# Altium PCB KC_BaseBoard4CompareTest.PcbDoc
Units mil, origin at the board's own origin, x right, y up, seen from the top; angles counter-clockwise.
Board outline 6745 x 7610 mil, 2 copper layers (Top Layer, Bottom Layer); 104 components, 67 nets, 264 pads, 2 vias.
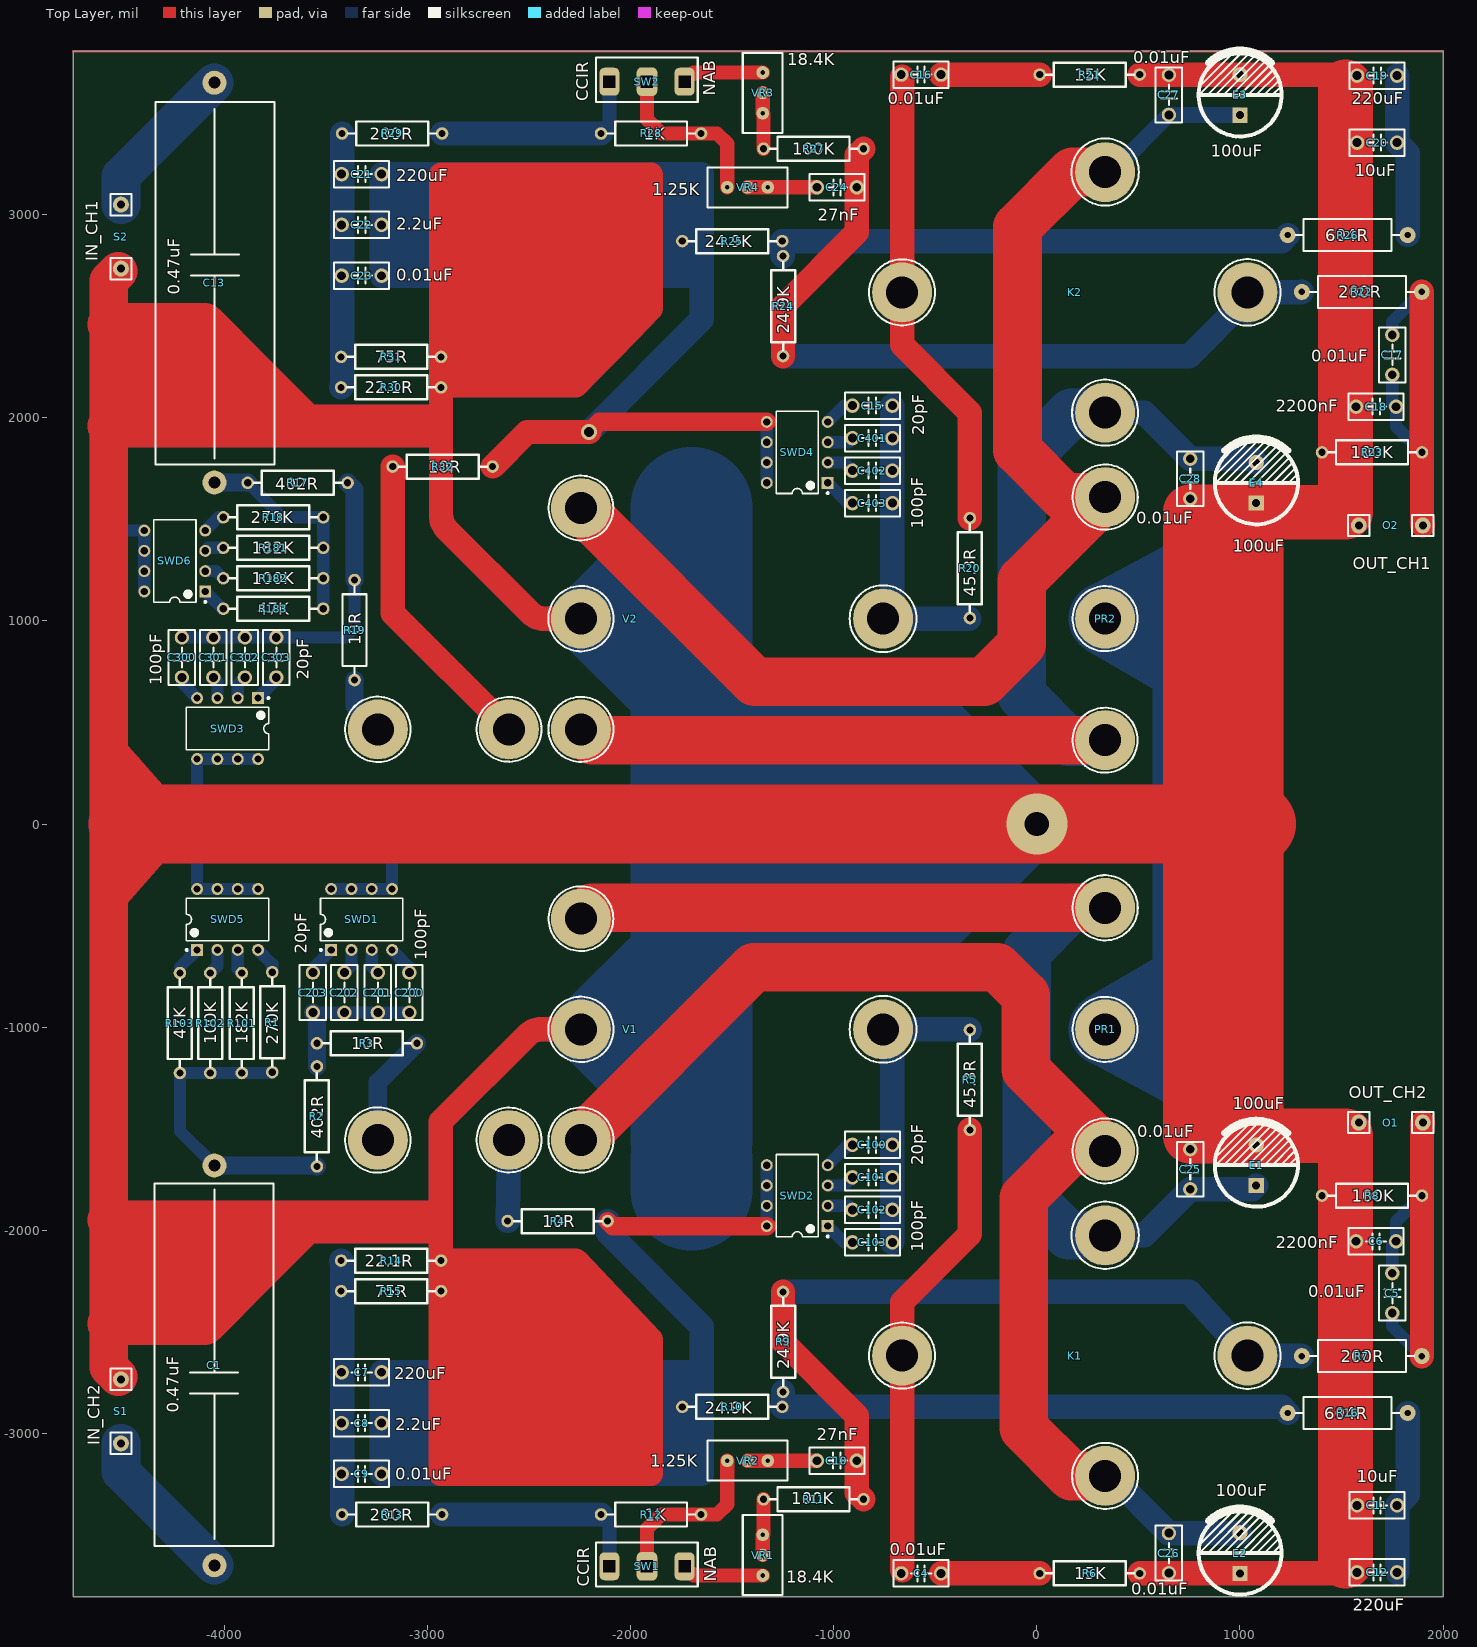
[diagram p0: Top Layer view]
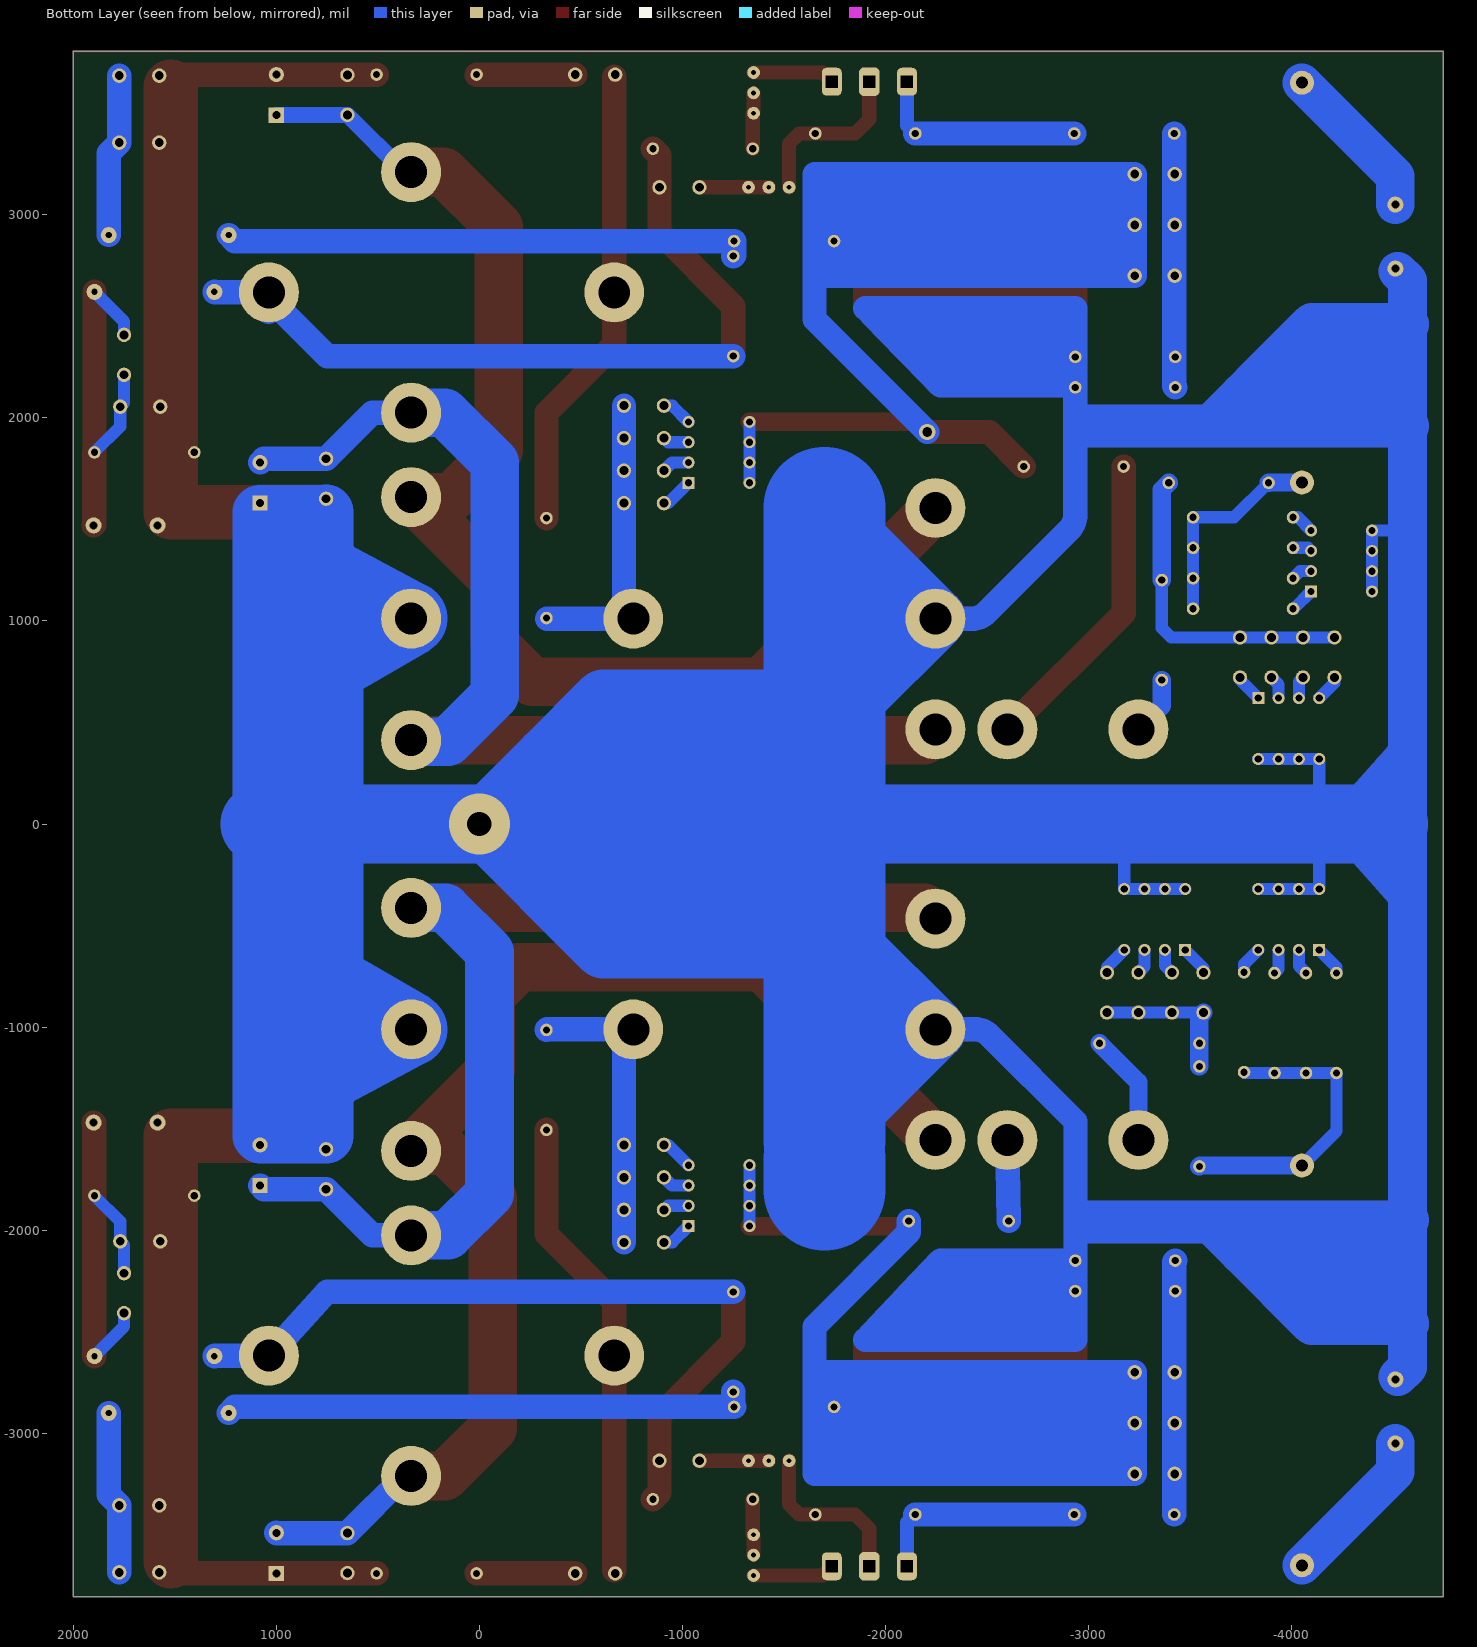
[diagram p1: Bottom Layer view, seen from below]

## Layer stack, top to bottom
Top Solder: solder mask 0.4, Solder Resist, Dk 3.5
Top Layer: signal copper 1.4
Dielectric 1: dielectric 12.6, FR-4, Dk 4.8
Bottom Layer: signal copper 1.4
Bottom Solder: solder mask 0.4, Solder Resist, Dk 3.5

## Board outline
-4745,-3805 2000,-3805 2000,3805 -4745,3805

## Design rules (kind name [scope] priority, off if disabled: settings)
Clearance [All] p1: gap=10 ignorepadtopadclearanceinfootprint=FALSE except(0: Arc-Hole Track-Hole SMDPad-Hole THPad-Hole Via-Hole Fill-Hole Poly-Hole Region-Hole Text-Hole)
PolygonConnect [All] p1: connectstyle=Relief reliefconductorwidth=10 reliefentries=4 polygonreliefangle="90 Angle" airgapwidth=10
RoutingVias [All] p1: holewidth=28 width=50 viastyle="Through Hole" minholewidth=28 minwidth=50 maxholewidth=28 maxwidth=50
SolderMaskExpansion [All] p1: expansion=4
Width [All] p1: maxlimit=1200 minlimit=10 preferedwidth=60
30 further rules are at their usual default settings.

## Components (designator, comment, footprint, x,y, rotation, side; value= is the part's Value field where it differs from the comment)
C1 "0.47uF" "CBB 50*30*30" -4050,-3650 r90 top
C4 "0.01uF" "CBB 6.3*6.3*5" -570,-3690 r0 top
C5 "0.01uF" "CBB 6.3*6.3*5" 1750,-2310 r90 top
C6 "2200nF" "CBB 6.3*6.3*5" 1670,-2055 r0 top
C7 "220uF" "CBB 6.3*6.3*5" -3325,-2700 r0 top
C8 "2.2uF" "CBB 6.3*6.3*5" -3325,-2950 r0 top
C9 "0.01uF" "CBB 6.3*6.3*5" -3325,-3200 r0 top
C10 "27nF" "CBB 6.3*6.3*5" -985,-3135 r0 top
C11 "10uF" "CBB 6.3*6.3*5" 1675,-3355 r0 top
C12 "220uF" "CBB 6.3*6.3*5" 1675,-3685 r0 top
C13 "0.47uF" "CBB 50*30*30" -4050,3650 r270 top
C15 "100pF" "CBB 6.3*6.3*5" -810,2060 r0 top
C16 "0.01uF" "CBB 6.3*6.3*5" -570,3690 r0 top
C17 "0.01uF" "CBB 6.3*6.3*5" 1750,2310 r90 top
C18 "2200nF" "CBB 6.3*6.3*5" 1670,2055 r180 top
C19 "220uF" "CBB 6.3*6.3*5" 1675,3685 r180 top
C20 "10uF" "CBB 6.3*6.3*5" 1675,3355 r180 top
C21 "220uF" "CBB 6.3*6.3*5" -3325,3200 r180 top
C22 "2.2uF" "CBB 6.3*6.3*5" -3325,2950 r180 top
C23 "0.01uF" "CBB 6.3*6.3*5" -3325,2700 r180 top
C24 "27nF" "CBB 6.3*6.3*5" -985,3135 r180 top
C25 "0.01uF" "CBB 6.3*6.3*5" 755,-1700 r90 top
C26 "0.01uF" "CBB 6.3*6.3*5" 650,-3590 r270 top
C27 "0.01uF" "CBB 6.3*6.3*5" 650,3590 r90 top
C28 "0.01uF" "CBB 6.3*6.3*5" 755,1700 r270 top
C100 "100pF" "CBB 6.3*6.3*5" -810,-1580 r0 top
C101 "100pF" "CBB 6.3*6.3*5" -810,-1740 r0 top
C102 "100pF" "CBB 6.3*6.3*5" -810,-1900 r0 top
C103 "20pF" "CBB 6.3*6.3*5" -810,-2060 r0 top
C200 "100pF" "CBB 6.3*6.3*5" -3090,-830 r270 top
C201 "100pF" "CBB 6.3*6.3*5" -3245,-830 r270 top
C202 "100pF" "CBB 6.3*6.3*5" -3410,-830 r270 top
C203 "20pF" "CBB 6.3*6.3*5" -3565,-830 r270 top
C300 "100pF" "CBB 6.3*6.3*5" -4210,820 r90 top
C301 "100pF" "CBB 6.3*6.3*5" -4055,820 r90 top
C302 "100pF" "CBB 6.3*6.3*5" -3900,820 r90 top
C303 "20pF" "CBB 6.3*6.3*5" -3745,820 r90 top
C401 "100pF" "CBB 6.3*6.3*5" -810,1900 r0 top
C402 "100pF" "CBB 6.3*6.3*5" -810,1740 r0 top
C403 "20pF" "CBB 6.3*6.3*5" -810,1580 r0 top
E1 "100uF" "CAP 5.0*10*20" 1080,-1680 r90 top
E2 "100uF" "CAP 5.0*10*20" 1000,-3590 r90 top
E3 "100uF" "CAP 5.0*10*20" 1000,3590 r90 top
E4 "100uF" "CAP 5.0*10*20" 1080,1680 r90 top
K1 "KCBuff" KCBuff_M4 -663.9,-2617.7 r0 top
K2 "KCBuff" KCBuff_M4 -663.9,2617.7 r0 top
O1 "OUT_CH2" SIGNAL_TERMINAL 1900,-1470 r180 top
O2 "OUT_CH1" SIGNAL_TERMINAL 1900,1470 r180 top
PR1 "MainBoardPowerRegulator4CompareTest" KC_MBPowerReg4Compare 336,-1011 r0 top
PR2 "MainBoardPowerRegulator4CompareTest" KC_MBPowerReg4Compare 336,1011 r0 top
R1 "270K" "RS 1/2W" -3765,-976.06 r270 top
R2 "402R" "RS 1/2W" -3545,-1440 r90 top
R3 "10R" "RS 1/2W" -3298.94,-1080 r180 top
R4 "10R" "RS 1/2W" -2360,-1955 r180 top
R5 "45.3R" "RS 1/2W" -330,-1260 r90 top
R6 "15K" "RS 1/2W" 260,-3690 r180 top
R7 "200R" "RS 1W" 1600,-2620 r0 top
R8 "100K" "RS 1/2W" 1650,-1830 r0 top
R9 "24.9K" "RS 1/2W" -1250,-2550 r270 top
R10 "24.9K" "RS 1/2W" -1500,-2870 r180 top
R11 "100K" "RS 1/2W" -1100,-3325 r180 top
R12 "1K" "RS 1/2W" -1900,-3400 r0 top
R13 "200R" "RS 1/2W" -3175,-3400 r180 top
R14 "22.1R" "RS 1/2W" -3180,-2150 r180 top
R15 "75R" "RS 1/2W" -3180,-2300 r180 top
R16 "604R" "RS 1W" 1530,-2900 r180 top
R17 "402R" "RS 1/2W" -3640,1680 r0 top
R18 "270K" "RS 1/2W" -3760,1510 r0 top
R19 "10R" "RS 1/2W" -3360,955 r270 top
R20 "45.3R" "RS 1/2W" -330,1260 r90 top
R21 "15K" "RS 1/2W" 260,3690 r0 top
R22 "200R" "RS 1W" 1600,2620 r180 top
R23 "100K" "RS 1/2W" 1650,1830 r180 top
R24 "24.9K" "RS 1/2W" -1250,2550 r270 top
R25 "24.9K" "RS 1/2W" -1500,2870 r0 top
R26 "604R" "RS 1W" 1530,2900 r180 top
R27 "100K" "RS 1/2W" -1100,3325 r180 top
R28 "1K" "RS 1/2W" -1900,3400 r0 top
R29 "200R" "RS 1/2W" -3175,3400 r180 top
R30 "22.1R" "RS 1/2W" -3180,2150 r180 top
R31 "75R" "RS 1/2W" -3180,2300 r180 top
R32 "10R" "RS 1/2W" -2926.06,1760 r180 top
R101 "182K" "RS 1/2W" -3915,-980 r270 top
R102 "100K" "RS 1/2W" -4070,-980 r270 top
R103 "47K" "RS 1/2W" -4220,-980 r270 top
R181 "182K" "RS 1/2W" -3760,1360 r0 top
R182 "100K" "RS 1/2W" -3760,1210 r0 top
R183 "47K" "RS 1/2W" -3760,1060 r0 top
S1 "IN_CH2" SIGNAL_TERMINAL -4510,-3050 r90 top
S2 "IN_CH1" SIGNAL_TERMINAL -4510,3050 r270 top
SW1 "SW-3P-2S" SS-12D06 -1920,-3655 r0 top
SW2 "SW-3P-2S" SS-12D06 -1920,3655 r0 top
SWD1 "SW-DIP4" DIP-8 -3325,-470 r90 top
SWD2 "SW-DIP4" DIP-8 -1180,-1830 r180 top
SWD3 "SW-DIP4" DIP-8 -3985,470 r270 top
SWD4 "SW-DIP4" DIP-8 -1180,1830 r180 top
SWD5 "SW-DIP4" DIP-8 -3985,-470 r90 top
SWD6 "SW-DIP4" DIP-8 -4245,1295 r180 top
V1 "KCInputVas" KCIn_VAS_M4 -3245,-1556 r0 top
V2 "KCInputVas" KCIn_VAS_M4 -3245,466 r0 top
VR1 "18.4K" "RS 1/2W-VR" -1350,-3600 r270 top
VR2 "1.25K" "RS 1/2W-VR" -1425,-3135 r180 top
VR3 "18.4K" "RS 1/2W-VR" -1350,3600 r90 top
VR4 "1.25K" "RS 1/2W-VR" -1425,3135 r180 top

## Footprints (in the part's own frame and the unit in brackets; to place one, negate y for a bottom-side part, rotate by r counter-clockwise, add the part's x,y. Pads: shape width x height; smd on the part's side, far side on the other; paste and mask are expansions set on the pad)
"CAP 5.0*10*20" [mm] "脚距5mm直径10mm高度20mm"
  rect 1.9x1.9 hole 1: 1(-2.54,0)
  round 1.9 hole 1: 2(2.54,0)
  silkscreen extent -5.19,-5.21 5.69,5.19, body extent -5,-5 5.01,5, height 20.03
"CBB 6.3*6.3*5" [mm] "脚距5mm高6.3mm厚3mm"
  round 1.8 hole 1.1: 1(-2.5,0) 2(2.5,0)
  silkscreen extent -3.43,-1.65 3.43,1.65, body extent -3.15,-1.5 3.15,1.5, height 6.8
"CBB 50*30*30" [mm] "大型耦合电容 脚距50mm 宽30mm"
  round 3 hole 1.5: 1(0,0) 2(50,0)
  silkscreen extent 2.41,-7.37 47.75,7.49, body extent 2.41,-7.49 47.75,7.62, height 30.3
DIP-8 [mm] "DIP; 8 Leads; Row Spacing 7.62 mm; Pitch 2.54 mm"
  rect 1.5x1.5 hole 0.9: 1(-3.81,3.81)
  round 1.5 hole 0.9: 2(-3.81,1.27) 3(-3.81,-1.27) 4(-3.81,-3.81) 5(3.81,-3.81) 6(3.81,-1.27) 7(3.81,1.27) 8(3.81,3.81)
  silkscreen extent -3.93,-5.15 2.65,5.23, body extent -3.6,-5.15 3.6,5.15, height 5.08
KC_MBPowerReg4Compare [mm]
  round 7.5 hole 4: 1(0,15.2) 2(0,-15.2) 3(0,0)
  silkscreen extent -4.07,-19.26 4.08,19.28
KCBuff_M4 [mm]
  round 7.5 hole 4: 1(0,0) 2(43.199,0) 3(25.397,15.05) 4(25.397,-15.05)
  silkscreen extent -4.13,-19.18 47.35,19.25
KCIn_VAS_M4 [mm]
  round 7.5 hole 4: 1(0,0) 2(16.396,0) 3(25.4,27.686) 4(25.4,0) 5(25.4,13.843) 6(63.182,13.843)
  silkscreen extent -4.09,-4.09 67.36,31.73
"RS 1/2W" [mil] "直插色环电阻，脚距12.5mm，直径3mm"
  round 62 hole 35.43: 1(-246.06,0) 2(246.06,0)
  silkscreen extent -217,-59 217,59, body extent -256,-59 256,59, height 122
"RS 1/2W-VR" [mm] "直插3脚顶调可调电阻，脚距2.54mm，长10mm*宽5mm*高10mm"
  round 1.6 hole 0.6: 1(-2.54,0) 2(2.54,0) 3(0,0)
  silkscreen extent -5,-2.5 5,2.5
"RS 1W" [mm] "直插色环电阻，脚距15mm，直径4mm"
  round 2 hole 0.8: 1(-7.5,0) 2(7.5,0)
  silkscreen extent -6.5,-2 6.5,2, body extent -7.8,-2.01 7.8,2.01, height 4.11
SIGNAL_TERMINAL [mm]
  round 2 hole 1: 1(0,0) 2(8,0)
  silkscreen extent -1.35,-1.3 9.35,1.3
SS-12D06 [mm]
  rrect50% 2.5x3.5 hole 1.5 square: 1(-4.7,0) 3(4.7,0)
  rrect50% 2.6x3.6 hole 1.5 square: 2(0,0)
  silkscreen extent -6.35,-2.54 6.35,3

## Part data
C1 C4 C5 C6 C7 C8 C9 C10 C11 C12 C13 C15 C16 C17 C18 C19 C20 C21 C22 C23 C24 C25 C26 C27 C28 C100 C101 C102 C103 C200 C201 C202 C203 C300 C301 C302 C303 C401 C402 C403: library part C-CBB, "CBB电容", BOM名称=CBB电容, 学习资源=www.ooocke.com, 版权归属=源创客
E1 E2 E3 E4: library part C-CAP, "直插电解电容", BOM名称=直插电解电容, 学习资源=www.ooocke.com, 版权归属=源创客
K1 K2: "King Cello Buffer Stage"
O1 O2: library part Signal_Out, "Signal Out"
PR1 PR2: "King Cello Compare Test Power"
R1 R2 R3 R4 R5 R6 R7 R8 R9 R10 R11 R12 R13 R14 R15 R16 R17 R18 R19 R20 R21 R22 R23 R24 R25 R26 R27 R28 R29 R30 R31 R32 R101 R102 R103 R181 R182 R183: library part R-CRR, "直插色环电阻", BOM名称=色环电阻, 学习资源=www.ooocke.com, 版权归属=源创客
S1 S2: library part Signal_In, "Signal In"
SW1 SW2: "3 Pin 2 Switch"
SWD1 SWD2 SWD3 SWD4 SWD5 SWD6: "DIP Switch", LatestRevisionDate=17-Jul-2002, LatestRevisionNote="Re-released for DXP Platform.", PackageReference=DIP-8, Published=24-Mar-1999, Publisher="Altium Limited"
V1 V2: "King Cello Input Stage and VAS"
VR1 VR2 VR3 VR4: library part VR-W, "直插可调电阻-顶调"

## Via types
v1: diameter 80, hole 48, Top Layer to Bottom Layer, 1 vias
v2: diameter 300, hole 120, Top Layer to Bottom Layer, 1 vias

## Nets (pads, with @x,y where several pads share a name; then routed paths per layer and width w, separated by ;. In a path a pad name is that pad's centre, name@x,y a point inside that pad or via, vN(x,y) a via of type N, cw(c..) or ccw(c..) an arc to the next point about the centre after c; other vN are vias at no path point)
GND: C6.1 C11.1 C12.1 C18.2 C19.2 C20.2 C25.2 C26.2 C27.2 C28.2 E1.2 E2.1 E3.2 E4.1 O1.2 O2.2 PR1.3 PR2.3 R6.1 R8.1 R14.1 R15.1 R21.2 R23.2 R30.1 R31.1 S1.2 S2.2 SWD1.5 SWD1.6 SWD1.7 SWD1.8 SWD3.5 SWD3.6 SWD3.7 SWD3.8 SWD5.5 SWD5.6 SWD5.7 SWD5.8 SWD6.5 SWD6.6 SWD6.7 SWD6.8 V1.5 V2.5 | length 136951.5
  Top Layer w100: -4445,-1960 -4445,-2385 -4435,-2385 ; -4430,2015 -4430,2460 -4420,2460 ; -4365,-2460 -4365,-2055 -4360,-2055 ; -4345,2405 -4335,2405 -4335,1960 ; -4305,-1960 -4305,-2390 -4220,-2390 -4220,-2050 ; -4295,2205 -4295,2232.5 -4270,2232.5 ; -4270,2460 -4270,2325 ; -4240,2015 -4270,2015 -4270,2100 ; -4145,-2365 -4120,-2365 -4120,-2245 ; -4120,-1960 -4120,-2085 ; -4100,-2170 -3857.5,-2170 -3857.5,-2217.5 ; -4045,2320 -4045,2325 -4270,2325 ; -4005,-2245 -4120,-2245 ; -3910,2155 -4270,2155 ; -3872.5,2232.5 -4270,2232.5 ; -3865,-2085 -4120,-2085 ; -3860,2100 -4270,2100 ; -4270,2100 -4270,2155 ; -4270,2155 -4270,2232.5 ; -4270,2232.5 -4270,2325 ; -4120,-2245 -4120,-2085
  Top Layer w120: -4260,0 -4150,110 ; -4155,-20 -4150,-25 ; -3950,-20 -3950,0 -3950,5 -3945,0 ; -2935,0 -2930,5 ; R14.1 -2270,-2150 -1900,-2540 -1900,-3200 -2935,-3200 -2935,-3100 ; -2920,2335 -2109.47,2324.87 ; -2890,2240 -2200.81,2231.06 ; V1.5 -2439.58,-1011 ccw(c-2439.58,-1111) -2510.29,-1040.29 -2935,-1465 -2935,-2235 ; V2.5 -2424.58,1011 cw(c-2424.58,1111) -2495.29,1040.29 -2904.65,1449.65 cw(c-2833.94,1520.36) -2933.94,1520.36 R30.1 R30.1@-2933.94,2160 ; -2235,-2235 -2935,-2235 ; -2160,-2300 -2933.93,-2297.44 R15.1@-2935,-2297.43 ; -2110,-2395 -2935,-2395 ; -1975,-2495 -2935,-2495 ; -1950,-2690 -2935,-2690 ; -1940,-3100 -2935,-3100 ; -1925,-2905 -2935,-2905 ; -1925,-2800 -2935,-2800 ; -1925,-2590 -2935,-2590 ; -1920,-3000 -2935,-3000 ; R6.1 506.06,-3688.43 C26.2 998.43,-3688.43 E2.1 1460,-3690 1520,-3630 ; R21.2 650,3690 C27.2 651.57,3690 E3.2 1460,3690 1520,3630 ; -2935,-3100 -2935,-3000 ; -2935,-3000 -2935,-2905 ; -2935,-2905 -2935,-2800 ; -2935,-2800 -2935,-2690 ; -2935,-2690 -2935,-2590 ; -2935,-2590 -2935,-2495 ; -2935,-2495 -2935,-2395 ; -2935,-2395 -2935,-2302.57 cw(c-2931.37,-2302.57) R15.1 cw(c-2931.37,-2297.43) R15.1@-2935,-2297.43 ; R15.1@-2935,-2297.43 -2935,-2235 ; R30.1@-2933.94,2160 -2270,2160 -2200.81,2231.06 ; R30.1@-2933.94,2160 R31.1 -2933.94,2430 ; -2933.94,2430 -2933.94,2535 ; -2933.94,2430 -2008.25,2428.82 ; -2933.94,2535 -2933.94,2645 ; -2933.94,2535 -1900,2540 ; -2933.94,2645 -2933.94,2750 ; -2933.94,2645 -1900,2645 ; -2933.94,2750 -2933.94,2855 ; -2933.94,2750 -1900,2750 ; -2933.94,2855 -2933.94,2975 ; -2933.94,2855 -1900,2855 ; -2933.94,2975 -2933.94,3085 ; -2933.94,2975 -1900,2975 ; -2933.94,3085 -2933.94,3197.43 -1900,3197.43 -1900,3085 ; -2933.94,3085 -1900,3085 ; -2200.81,2231.06 -2109.47,2324.87 ; -2109.47,2324.87 -2008.25,2428.82 ; -2008.25,2428.82 -1900,2540 ; -1900,2540 -1900,2645 ; -1900,2645 -1900,2750 ; -1900,2750 -1900,2855 ; -1900,2855 -1900,2975 ; -1900,2975 -1900,3085
  Top Layer w190: S1.2@-4522.71,-2722.71 -4570,-2675.42 -4570,-2460 -4570,-1950 -4570,-350 ; S2.2@-4522.71,2722.71 -4570,2675.42 -4570,2460 -4570,1960 -4570,350 ; -4293.51,0 -4277.71,-20 ; -3256,0 -3276,-20 -3950,-20 -4155,-20 -4277.71,-20 ; -4570,-350 -4570,-20 ; -4570,-350 -4277.71,-20 ; -4570,-20 -4570,350 ; -4570,-20 -4277.71,-20 ; -4570,350 -4544.74,321.48 -4490.08,259.76 -4260,0 -4277.71,-20
  Top Layer w210: -4570,-2460 -4365,-2460 -4100,-2460 -3857.5,-2217.5 -3600,-1960 ; -4570,-1950 -4560,-1960 -4445,-1960 -4305,-1960 -4120,-1960 -3600,-1960 ; -4570,1960 -4335,1960 -3600,1960 ; -4570,2460 -4430,2460 ; -4420,2460 -4270,2460 -4100,2460 -3872.5,2232.5 -3600,1960 ; -2990,1960 -3600,1960 ; -2980,-1960 -3600,-1960
  Top Layer w270: 1520,-3630 1520,-1830 1520,-1535 1080,-1535 ; 1520,3630 1520,3355 1520,1535 1080,1535 ; 900,-1536.57 755,-1536.57 755,0 755,1536.57 910,1536.57 ; 900,-1536.57 910,-1526.57 910,0 910,1536.57 ; 900,-1536.57 1078.43,-1536.57 1080,-1535 ; 910,1536.57 1078.43,1536.57 1080,1535 ; 1080,-1535 1080,0 1080,1535
  Top Layer w390: -4475,0 -4293.51,0 -4260,0 -3950,0 -3945,0 -3256,0 -2935,0 v2(0,0) 755,0 910,0 1080,0
  Bottom Layer w60: -4570,1440 -4565,1445 SWD6.5 SWD6.6 SWD6.7 SWD6.8 ; -4260,0 -4135,-125 SWD5.8 SWD5.7 SWD5.6 SWD5.5 ; -3955,0 -4135,180 SWD3.5 SWD3.6 SWD3.7 SWD3.8 ; SWD1.8 SWD1.7 SWD1.6 SWD1.5 -3175,-5 -3180,0
  Bottom Layer w100: -4570,2315 -4430,2315 ; -4555,-2065 -4555,-2112.5 -3752.5,-2112.5 ; -4440,-2460 -4440,-2170 -4365,-2170 -4365,-2460 ; -4430,1960 -4430,2110 ; -4290,-2460 -4290,-2190 -4220,-2190 ; -4220,-2460 -4220,-2190 ; -4205,-2190 -4220,-2190 ; -4150,-2460 -4150,-2185 -3985,-2185 -3985,-2285 -4095,-2285 -4095,-2235 ; -4010,2255 -4430,2255 ; -3955,2315 -4430,2315 ; -3842.5,2202.5 -3842.5,2200 -4430,2200 ; -3755,2115 -3755,2110 -4430,2110 ; -4430,2110 -4430,2200 ; -4430,2200 -4430,2255 ; -4430,2255 -4430,2315
  Bottom Layer w120: -4570,-2150 -4555,-2065 ; -4570,2160 -4560,2150 ; -4260,0 -4150,110 ; -3955,0 -3950,5 -3950,0 ; R14.1 -2270,-2150 -2176.54,-2248.51 ; V1.5 -2439.58,-1011 ccw(c-2439.58,-1111) -2510.29,-1040.29 -2935,-1465 -2935,-2245 ; V2.5 -2424.58,1011 cw(c-2424.58,1111) -2495.29,1040.29 -2904.65,1449.65 cw(c-2833.94,1520.36) -2933.94,1520.36 R30.1 R30.1@-2933.94,2160 ; -2935,-2245 -2180.05,-2245 -2176.54,-2248.51 ; -2935,-2245 -2935,-2297.43 ccw(c-2931.37,-2297.43) R15.1 -2933.94,-2375 ; -2933.94,-2455 -2904.3,-2425.36 -2008.76,-2425.36 ; -2933.94,-2455 -2933.94,-2540 -1900,-2540 -2008.76,-2425.36 ; -2933.94,-2455 -2933.94,-2375 ; -2933.94,-2375 -2078.05,-2375 -2067.01,-2363.96 ; -2933.94,-2375 -2868.72,-2309.78 -2118.42,-2309.78 ; R30.1@-2933.94,2160 -2270,2160 -2222.65,2208.63 ; R30.1@-2933.94,2160 -2933.94,2240 ; -2933.94,2240 -2254.02,2240 -2222.65,2208.63 ; -2933.94,2240 R31.1 ; R31.1 -2933.94,2440 ; R31.1 -2914.13,2319.81 -2114.4,2319.81 ; -2933.94,2440 -2014.23,2440 -2005.69,2431.46 ; -2933.94,2440 -2933.94,2540 -1900,2540 -2005.69,2431.46 ; -2222.65,2208.63 -2114.4,2319.81 ; -2176.54,-2248.51 -2118.42,-2309.78 ; -2118.42,-2309.78 -2067.01,-2363.96 ; -2114.4,2319.81 -2005.69,2431.46 ; -2067.01,-2363.96 -2008.76,-2425.36
  Bottom Layer w190: S1.2@-4522.71,-2722.71 -4570,-2675.42 -4570,-2460 -4570,-2150 -4570,-1950 -4570,-350 ; S2.2@-4522.71,2722.71 -4570,2675.42 -4570,2460 -4570,2315 -4570,2160 -4570,1960 -4570,1440 -4570,350 ; -4570,-350 -4570,350 ; -4570,-350 -4260,0 -4490.08,259.76 -4544.74,321.48 -4570,350
  Bottom Layer w210: -4570,-2460 -4440,-2460 -4365,-2460 -4290,-2460 -4220,-2460 -4150,-2460 -4100,-2460 -3752.5,-2112.5 -3600,-1960 ; -4570,-1950 -4560,-1960 -3600,-1960 ; -4570,1960 -4430,1960 -3600,1960 ; -4570,2460 -4100,2460 -3955,2315 -3842.5,2202.5 -3755,2115 -3600,1960 ; -2995,1960 -3600,1960 ; -2990,-1960 -3600,-1960
  Bottom Layer w270: 765,-1240 785,-1240 1080,-1535 ; 755,1234.66 765,1234.66 779.66,1234.66 1080,1535 ; 755,1234.66 755,1536.57 756.57,1535 1080,1535 ; 755,1234.66 755,765.85 755,0 755,-765.85 755,-1234.66 755,-1536.57 1078.43,-1536.57 1080,-1535 ; 1080,-1535 1080,0 1080,1535
  Bottom Layer w300: -1700,-1650 -1700,-1556 V1.5 ; -1700,-1015 -1704,-1011 V1.5 ; -1700,1005 -1706,1011 V2.5 ; -1700,1650 -1700,1556 V2.5 ; -440,-320 -1415,-320 -1700,-605 -1695,-610 ; V1.5 -1844,-610 -1700,-610 -1695,-610 ; V2.5 -1849,615 -1700,615 -1695,610 ; -1695,-610 -610,-610 v2(0,0) -330,330 ; -1695,610 -610,610 -330,330 ; -1695,610 -1415,330 -330,330
  Bottom Layer w360: 765,-1240 755,-1234.66 PR1.3 755,-765.85 765,-760 ; 765,760 755,765.85 PR2.3 755,1234.66 765,1240
  Bottom Layer w390: -4475,0 -4260,0 -3955,0 -3950,0 -3180,0 -1700,0 v2(0,0) 755,0 765,0 ; 765,-1240 765,-760 765,0 ; 765,1240 765,1234.66 765,760 765,0 ; 1080,0 765,0
  Bottom Layer w600: -1700,-1800 -1700,-1650 ; -1700,-1556 -1700,-1015 -1700,-610 -1700,-605 -1700,0 -1700,615 -1700,1005 -1700,1556
NetC1_1: C1.1 S1.1 | length 790.5
  Bottom Layer w190: S1.1 -4510,-3190 C1.1
NetC1_2: C1.2 R1.2 R2.1 R101.2 R102.2 R103.2 | length 1489.4
  Bottom Layer w60: C1.2 -4220,-1511.5 R103.2 R102.2 R101.2 -3768.94,-1226.06 R1.2
  Bottom Layer w90: C1.2 -3549.57,-1681.5 R2.1
NetC4_1: C4.1 K1.1 R5.1 | length 2307.7
  Top Layer w120: C4.1@-663.9,-3675.47 K1.1 -663.9,-2353.9 -330,-2020 R5.1
NetC4_2: C4.2 R6.2 | length 485.5
  Top Layer w120: C4.2 R6.2
NetC5_1: C5.1 C5.2 C6.2 O1.1 R7.2 R8.2 | length 1865.8
  Top Layer w120: R7.2 1896.06,-2619.21 R8.2 1896.06,-1473.94 O1.1
  Bottom Layer w60: C5.1 1750,-2474.72 R7.2 ; C5.2 1750,-2073.43 C6.2 1768.43,-1957.64 R8.2
NetC7_1: C7.1 C8.1 C9.1 R13.2 R14.2 R15.2 | length 1252.1
  Bottom Layer w120: R14.2 -3421.06,-2155 -3421.06,-2700 R13.2
NetC7_2: C7.2 C8.2 C9.2 R4.1 R10.2 SWD2.5 SWD2.6 SWD2.7 SWD2.8 | length 12490.9
  Top Layer w90: R4.1 -2088.94,-1980 SWD2.8
  Bottom Layer w60: SWD2.8 SWD2.7 SWD2.6 SWD2.5
  Bottom Layer w120: R4.1 -2113.94,-2011.06 -1650,-2475 -1650,-2700 ; -3226.57,-3095 -1650,-3095 ; -3226.57,-3095 C9.2 -1650,-3200 -1650,-3095 ; -3226.57,-3095 -3226.57,-3000 ; -3226.57,-3000 -1650,-3000 ; -3226.57,-3000 C8.2 -3226.57,-2900 ; -3226.57,-2900 -1650,-2900 ; -3226.57,-2900 -3226.57,-2805 ; -3226.57,-2805 -1650,-2805 ; -3226.57,-2805 C7.2 -1650,-2700 ; -1650,-3095 -1650,-3000 ; -1650,-3000 -1650,-2900 ; -1650,-2900 -1650,-2805 ; -1650,-2805 -1650,-2700
NetC10_1: C10.1 VR2.1 VR2.3 | length 341.6
  Top Layer w70: VR2.3 VR2.1 C10.1
NetC10_2: C10.2 K1.2 R7.1 R9.1 R11.1 | length 3879.1
  Top Layer w120: R9.1 -1250,-2550 -886.57,-2913.43 -886.57,-3292.36 R11.1
  Bottom Layer w120: R9.1 750,-2303.94 K1.2 1302.42,-2617.7 R7.1
NetC11_2: C11.2 C12.2 R16.1 | length 806.5
  Bottom Layer w120: C12.2 C11.2 1825.28,-3303.15 R16.1
NetC13_1: C13.1 S2.1 | length 790.5
  Bottom Layer w190: S2.1 -4510,3190 C13.1
NetC13_2: C13.2 R17.1 R18.2 R181.2 R182.2 R183.2 | length 1057.1
  Bottom Layer w60: R17.1 -3716.06,1510 R18.2 R181.2 R182.2 R183.2
  Bottom Layer w90: C13.2 -3887.56,1681.5 R17.1
NetC15_1: C15.1 SWD4.4 | length 154.7
  Bottom Layer w60: SWD4.4 -950,2060 C15.1
NetC15_2: C15.2 C401.2 C402.2 C403.2 R20.1 V2.6 | length 1492.6
  Bottom Layer w120: C15.2 C401.2 C402.2 C403.2 -711.57,1056.93 V2.6 R20.1@-332.94,1011
NetC16_1: C16.1 K2.1 R20.2 | length 2312.2
  Top Layer w120: C16.1@-663.9,3680 K2.1 -663.9,2358.9 -330,2025 R20.2
NetC16_2: C16.2 R21.1 | length 485.5
  Top Layer w120: C16.2 R21.1
NetC17_1: C17.1 C17.2 C18.1 O2.1 R22.1 R23.1 | length 1865.8
  Top Layer w120: R22.1 1895.28,1830.79 R23.1 1896.06,1473.94 O2.1
  Bottom Layer w60: C17.1 1750,2073.43 C18.1 1768.43,1957.64 R23.1 ; C17.2 1750,2474.72 R22.1
NetC19_1: C19.1 C20.1 R26.1 | length 806.5
  Bottom Layer w120: C19.1 C20.1 1825.28,3303.15 R26.1
NetC21_1: C21.1 C22.1 C23.1 R25.1 R32.1 SWD4.5 SWD4.6 SWD4.7 SWD4.8 | length 13200.5
  Top Layer w90: v1(-2205,1930) -2155,1980 SWD4.5
  Top Layer w120: R32.1 -2510,1930 v1(-2205,1930)
  Bottom Layer w60: SWD4.8 SWD4.7 SWD4.6 SWD4.5
  Bottom Layer w120: v1(-2205,1930) -1650,2485 -1650,2700 ; -3226.57,2790 -1650,2790 ; -3226.57,2790 C23.1 -1650,2700 ; -3226.57,2790 -3226.57,2870 ; -3226.57,2870 R25.1 -1650,2870 ; -3226.57,2870 C22.1 C22.1@-3226.57,2965 ; C22.1@-3226.57,2965 -1650,2965 ; C22.1@-3226.57,2965 -3226.57,3080 ; -3226.57,3080 C21.1 -1650,3200 -1650,3080 ; -3226.57,3080 -1650,3080 ; -1650,2700 -1650,2790 ; -1650,2790 -1650,2870 ; -1650,2870 -1650,2965 ; -1650,2965 -1650,3080
NetC21_2: C21.2 C22.2 C23.2 R29.2 R30.2 R31.2 | length 1252.1
  Bottom Layer w120: R30.2 -3421.06,2155 -3421.06,2700 R29.2
NetC24_1: C24.1 K2.2 R22.2 R24.2 R27.1 | length 3956.5
  Top Layer w120: R24.2 -1250,2550 -886.57,2913.43 C24.1 -886.57,3292.36 R27.1
  Bottom Layer w120: R24.2 750,2303.94 K2.2@1036.85,2590.79 ; K2.2@1036.85,2520.79 K2.2@1036.85,2590.79 ; R22.2 1302.42,2617.7 K2.2 K2.2@1036.85,2590.79
NetC24_2: C24.2 VR4.1 VR4.3 | length 341.6
  Top Layer w70: VR4.3 VR4.1 C24.2
NetC25_1: C25.1 E1.1 K1.3 PR1.1 V1.3 | length 5585.8
  Top Layer w240: V1.3 -2191.57,-412.57 PR1.1
  Bottom Layer w120: K1.3 528.23,-2025.2 C25.1 1061.57,-1798.43 E1.1
  Bottom Layer w240: K1.3 155.2,-2025.2 -50,-1820 -50,-630 167.43,-412.57 PR1.1
NetC26_1: C26.1 E2.2 K1.4 PR1.2 V1.4 | length 6438
  Top Layer w210: PR1.2 PR1.2@336,-1601
  Top Layer w240: V1.4 -1394,-705 -195,-705 -55,-845 -55,-1210 PR1.2@336,-1601 ; K1.4 170.2,-3210.2 -65,-2975 -65,-1840 165.57,-1609.43 PR1.2
  Bottom Layer w120: K1.4 368.63,-3210.2 C26.1 998.43,-3491.57 E2.2
NetC27_1: C27.1 E3.1 K2.3 PR2.1 V2.3 | length 6444.3
  Top Layer w240: V2.3 -1389,700 -260,700 -75,885 -75,1198.43 PR2.1 135.57,1609.43 -95,1840 -95,2940 175.2,3210.2 K2.3
  Bottom Layer w80: K2.3@368.63,3210.2 C27.1 E3.1@998.43,3491.57
  Bottom Layer w120: K2.3 K2.3@368.63,3210.2
NetC28_1: C28.1 E4.2 K2.4 PR2.2 V2.4 | length 5615.7
  Top Layer w240: V2.4 -2191.57,412.57 PR2.2
  Bottom Layer w120: K2.4 528.23,2025.2 C28.1 1061.57,1798.43 E4.2
  Bottom Layer w240: PR2.2 328.43,405 155,405 -75,635 -75,1780 170.2,2025.2 K2.4
NetC100_1: C100.1 SWD2.4 | length 163
  Bottom Layer w60: SWD2.4 -930,-1580 C100.1
NetC100_2: C100.2 C101.2 C102.2 C103.2 R5.2 V1.6 | length 1496.7
  Bottom Layer w120: C103.2 C102.2 C101.2 C100.2 -711.57,-1056.93 V1.6 -332.94,-1011 R5.2
NetC101_1: C101.1 SWD2.3 | length 138.1
  Bottom Layer w60: SWD2.3 -948.43,-1780 C101.1
NetC102_1: C102.1 SWD2.2 | length 129.9
  Bottom Layer w60: SWD2.2 -928.43,-1880 C102.1
NetC103_1: C103.1 SWD2.1 | length 154.7
  Bottom Layer w60: SWD2.1 -950,-2060 C103.1
NetC200_1: C200.1 SWD1.4 | length 146.8
  Bottom Layer w60: SWD1.4 -3090,-705 C200.1
NetC200_2: C200.2 C201.2 C202.2 C203.2 R2.2 R3.2 | length 748.8
  Bottom Layer w60: C203.2 C200.2
  Bottom Layer w90: C203.2 -3545,-948.43 R3.2 R2.2
NetC201_1: C201.1 SWD1.3 | length 124
  Bottom Layer w60: SWD1.3 -3275,-701.57 C201.1
NetC202_1: C202.1 SWD1.2 | length 126.1
  Bottom Layer w60: C202.1 -3375,-696.57 SWD1.2
NetC203_1: C203.1 SWD1.1 | length 148.9
  Bottom Layer w60: C203.1 -3565,-710 SWD1.1
NetC300_1: C300.1 SWD3.4 | length 132.6
  Bottom Layer w60: C300.1 -4210,695 SWD3.4
NetC300_2: C300.2 C301.2 C302.2 C303.2 R17.2 R19.1 | length 1598.3
  Bottom Layer w60: C300.2 C301.2 C302.2 C303.2 -3406.57,918.43 -3360,965 R19.1
  Bottom Layer w90: R17.2 -3360,1646.06 R19.1
NetC301_1: C301.1 SWD3.3 | length 109.9
  Bottom Layer w60: C301.1 -4035,701.57 SWD3.3
NetC302_1: C302.1 SWD3.2 | length 116.1
  Bottom Layer w60: SWD3.2 -3935,686.57 C302.1
NetC303_1: C303.1 SWD3.1 | length 138.9
  Bottom Layer w60: SWD3.1 -3745,710 C303.1
NetC401_1: C401.1 SWD4.3 | length 129.9
  Bottom Layer w60: SWD4.3 -928.43,1880 C401.1
NetC402_1: C402.1 SWD4.2 | length 138.1
  Bottom Layer w60: SWD4.2 -948.43,1780 C402.1
NetC403_1: C403.1 SWD4.1 | length 163
  Bottom Layer w60: SWD4.1 -930,1580 C403.1
NetR1_1: R1.1 SWD5.4 | length 139
  Bottom Layer w60: SWD5.4 -3765,-690 R1.1
NetR3_1: R3.1 V1.1 | length 568.2
  Bottom Layer w90: V1.1 -3245,-1272.13 R3.1
  Bottom Layer w120: V1.1 V1.1@-3236.06,-1547.06
NetR4_2: R4.2 V1.2 | length 399.1
  Bottom Layer w120: R4.2 V1.2
NetR9_2: R9.2 R10.1 R16.2 | length 2576.7
  Bottom Layer w120: R9.2 -1250,-2866.06 R10.1 1204.72,-2870 R16.2
NetR11_2: R11.2 VR1.1 VR1.3 | length 276.6
  Top Layer w70: VR1.3 VR1.1 -1346.06,-3496.06 R11.2
NetR12_1: R12.1 R13.1 SW1.1 | length 1054.9
  Bottom Layer w70: R12.1 -2105.04,-3441.02 SW1.1
  Bottom Layer w120: R13.1 R12.1
NetR12_2: R12.2 SW1.2 VR2.2 | length 844.7
  Top Layer w70: SW1.2 -1920,-3470 -1850,-3400 R12.2 -1575,-3400 -1525,-3350 VR2.2
NetR18_1: R18.1 SWD6.4 | length 115.9
  Bottom Layer w60: SWD6.4 -4030,1510 R18.1
NetR19_2: R19.2 V2.1 | length 290.6
  Bottom Layer w90: R19.2 -3360,581 V2.1
NetR24_1: R24.1 R25.2 R26.2 | length 2576.7
  Bottom Layer w120: R24.1 -1253.94,2800 R25.2 1204.72,2870 R26.2
NetR27_2: R27.2 VR3.1 VR3.3 | length 276.6
  Top Layer w70: VR3.3 VR3.1 -1346.06,3496.06 R27.2
NetR28_1: R28.1 R29.1 SW2.1 | length 1054.9
  Bottom Layer w70: R28.1 -2105.04,3441.02 SW2.1
  Bottom Layer w120: R29.1 R28.1
NetR28_2: R28.2 SW2.2 VR4.2 | length 844.7
  Top Layer w70: SW2.2 -1920,3470 -1850,3400 R28.2 -1575,3400 -1525,3350 VR4.2
NetR32_2: R32.2 V2.2 | length 1545.9
  Top Layer w120: R32.2 -3172.13,1038.63 V2.2
  Bottom Layer w120: V2.2@-2605,479.28 ccw(c-2586.22,479.28) V2.2
NetR101_1: R101.1 SWD5.3 | length 122.2
  Bottom Layer w60: SWD5.3 -3935,-713.94 R101.1
NetR102_1: R102.1 SWD5.2 | length 128.4
  Bottom Layer w60: R102.1 -4035,-698.94 SWD5.2
NetR103_1: R103.1 SWD5.1 | length 149.1
  Bottom Layer w60: R103.1 -4220,-705 SWD5.1
NetR181_1: R181.1 SWD6.3 | length 95.2
  Bottom Layer w60: SWD6.3 -4080,1360 R181.1
NetR182_1: R182.1 SWD6.2 | length 103.4
  Bottom Layer w60: SWD6.2 -4041.06,1245 R182.1
NetR183_1: R183.1 SWD6.1 | length 124.1
  Bottom Layer w60: SWD6.1 -4010,1060 R183.1
NetSW1_3: SW1.3 VR1.2 | length 403.6
  Top Layer w70: SW1.3 -1689.96,-3700 VR1.2
NetSW2_3: SW2.3 VR3.2 | length 403.6
  Top Layer w70: SW2.3 -1689.96,3700 VR3.2
copper on no net: | length 6745
  Top Layer w10: -4745,3805 2000,3805

## Other copper
Top Layer:
  text "CCIR" at -2335,11340 h50
  text "CCIR" at -2600,11235 h50

## Silkscreen, mask and mechanical layers (free items; w line width, h text height)
Top Overlay:
  text "NAB" at -1585,3585 h60 r90
  text "CCIR" at -2210,3560 h60 r90
  text "NAB" at -1580,-3730 h60 r90
  text "CCIR" at -2205,-3755 h60 r90
Drill Drawing:
  lines w10: -4745,3805 -4745,-3805 2000,-3805 2000,3805